# Allegro board ClassDAmpBottom.brd
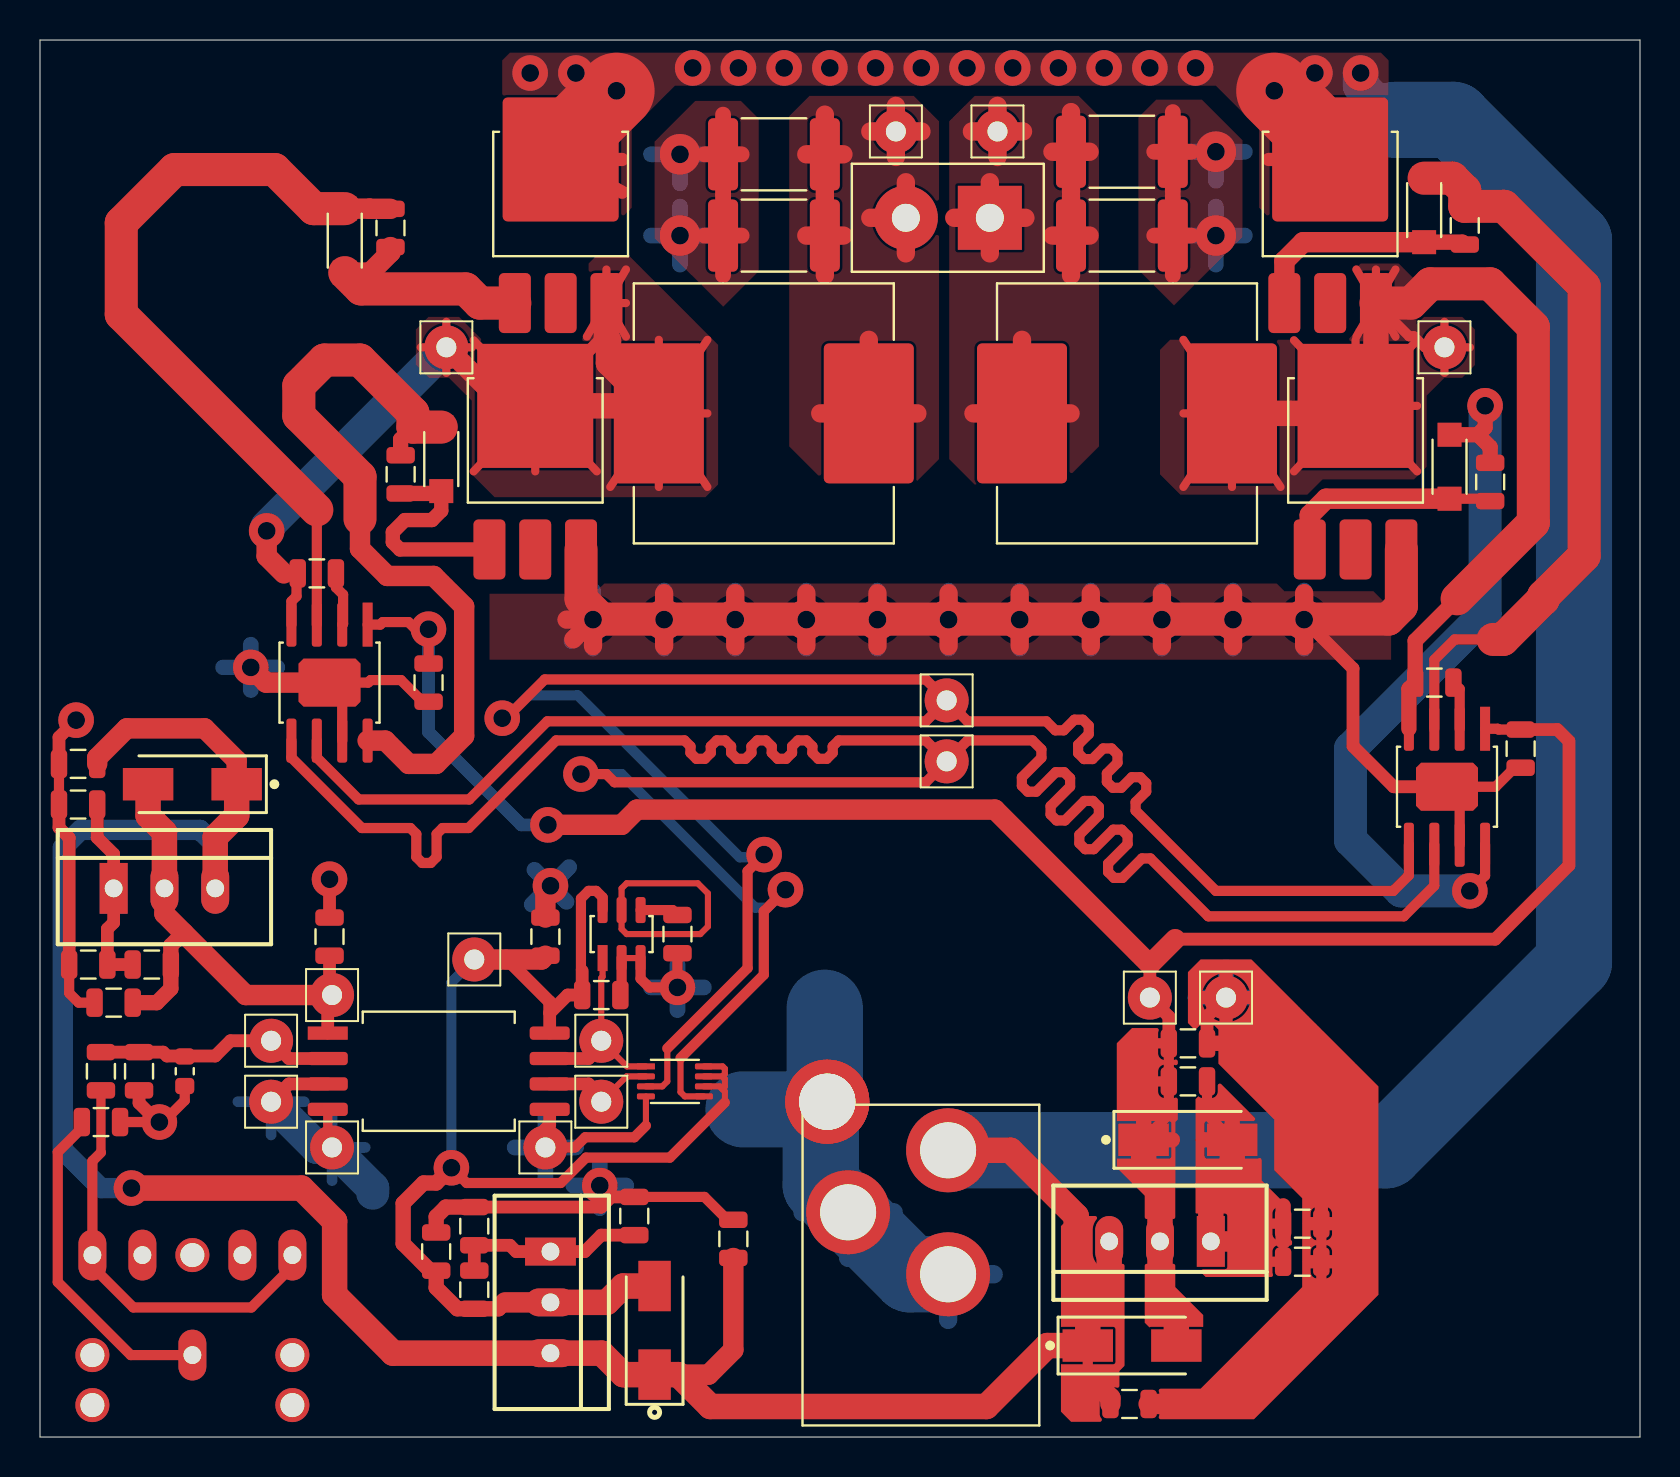
[diagram p0: board, top side]
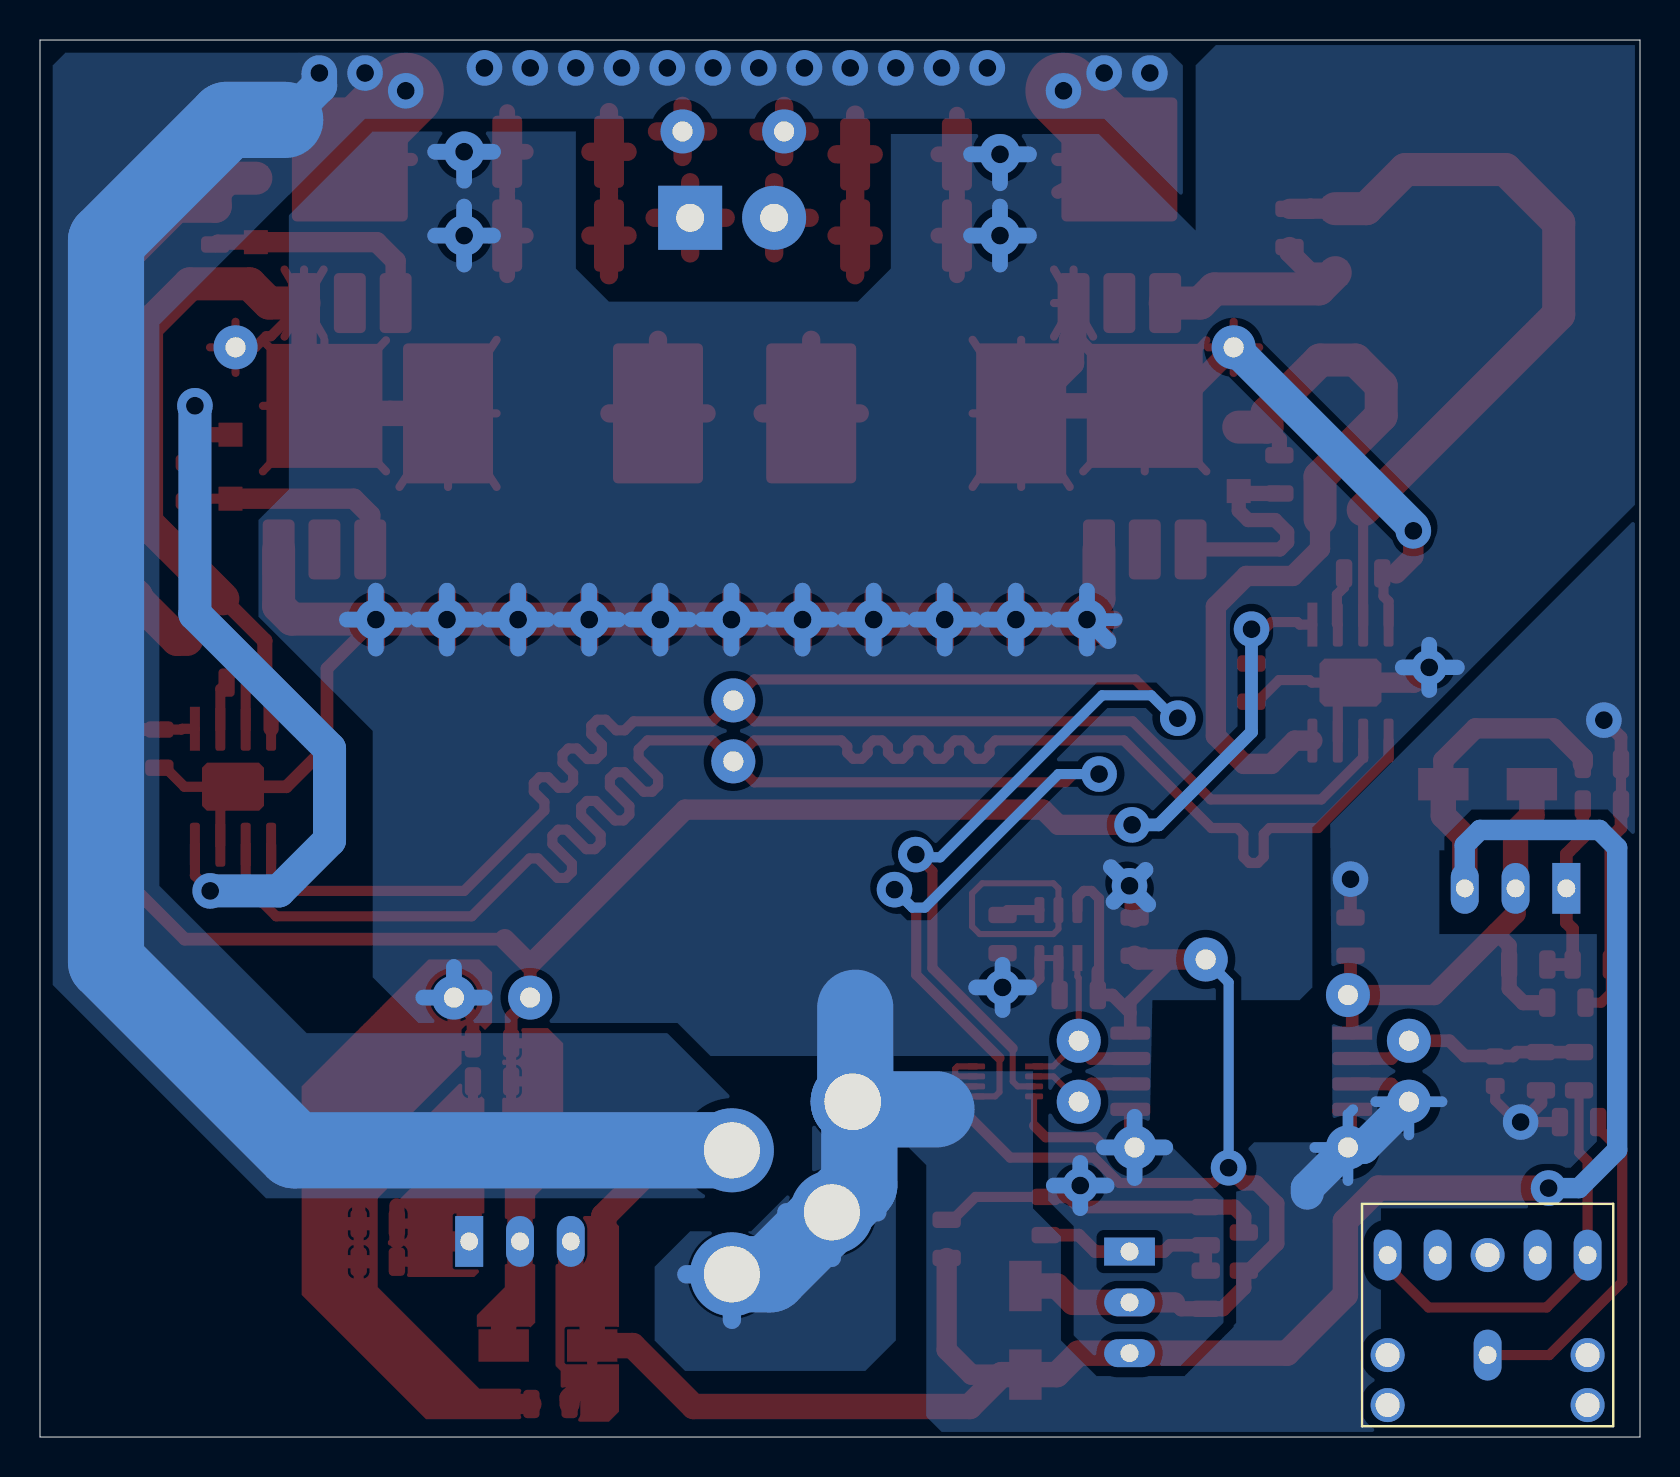
[diagram p1: board, bottom side, seen from below]

Outline 80.01 x 69.85 mm; copper layers: TOP, LAYER2, LAYER3, BOTTOM. Coordinates in mm from the lower left corner of the outline.
Outline path: 0,69.85 0,0 80.01,0 80.01,69.85 0,69.85

## Design rules (mm)
constraint set DEFAULT: min track width 0.152

## Placement (name value [footprint] x y rotation side)
C1  1n  [R0603RESC157X85X50L30N]  7.24 18.29 90 top
C2  100n  [R0805RESC200X125X50L30N]  14.48 25.02 90 top
C3  100n  [R0805RESC200X125X50L30N]  25.27 25.02 90 top
C4  100n  [R0805RESC200X125X50L30N]  28.07 22.1 180 top
C5  470n  [R0805RESC200X125X50L30N]  19.43 37.72 90 top
C6  470n  [R0805RESC200X125X50L30N]  74.04 34.42 90 top
C7  22n  [R0805RESC200X125X50L30N]  69.72 37.72 0 top
C8  22n  [R0805RESC200X125X50L30N]  13.84 43.18 180 top
C9  220n  [CAPC450X320X320L25]  36.7 64.14 0 top
C10  220n  [CAPC450X320X320L25]  54.1 64.26 180 top
C11  DNF  [CAPC450X320X320L25]  36.7 60.07 0 top
C12  DNF  [CAPC450X320X320L25]  54.1 60.07 180 top
C13  100n  [R0805RESC200X125X50L30N]  54.48 1.65 0 top
C14  1u  [R0805RESC200X125X50L30N]  57.4 19.68 0 top
C15  10u  [R0805RESC200X125X50L30N]  63.12 10.67 0 top
C16  100nF  [R0805RESC200X125X50L30N]  1.91 33.66 180 top
C17  1u  [R0805RESC200X125X50L30N]  3.68 21.72 180 top
C18  10u  [R0805RESC200X125X50L30N]  2.41 23.62 180 top
C19  1u  [R0805RESC200X125X50L30N]  19.81 9.27 90 top
C20  100n  [R0805RESC200X125X50L30N]  34.67 9.91 90 top
C21  10u  [R0805RESC200X125X50L30N]  21.72 10.54 90 top
D1  1N4148W  [GU-SOD-123FL]  15.24 59.82 270 top
D2  1N4148W  [GU-SOD-123FL]  20.07 48.9 270 top
D3  1N4148W  [GU-SOD-123FL]  70.48 48.51 270 top
D4  1N4148W  [GU-SOD-123FL]  69.22 61.34 270 top
D5  S1B  [DO-214AC]  57.4 14.86 0 top
D6  S1B  [DO-214AC]  54.61 4.57 0 top
D7  S1B  [DO-214AC]  30.73 5.33 90 top
D9  S1B  [DO-214AC]  7.62 32.64 180 top
J3  30V  [CLIFF_DC-10A_P]  49.91 0.64 90 top
J5  Output  [RHDRV2W140P420_550_2X1_960X5-1]  47.5 60.96 180 top
L1  10u  [INDM1270X1270X850L230X500]  36.2 51.18 0 top
L2  10u  [INDM1270X1270X850L230X500]  54.36 51.18 180 top
R1  2k  [R0805RESC200X125X50L30N]  3.05 18.29 90 top
R2  1k  [R0805RESC200X125X50L30N]  4.95 18.29 270 top
R3  2k  [R0805RESC200X125X50L30N]  3.05 15.75 0 top
R4  200K  [R0805RESC200X125X50L30N]  31.88 25.15 90 top
R5  10  [R0805RESC200X125X50L30N]  17.53 60.45 270 top
R6  10  [R0805RESC200X125X50L30N]  18.03 48.13 270 top
R7  10  [R0805RESC200X125X50L30N]  71.25 60.58 90 top
R8  10  [R0805RESC200X125X50L30N]  72.52 47.75 90 top
R9  1.65k  [R0805RESC200X125X50L30N]  63.12 8.76 0 top
R10  240  [R0805RESC200X125X50L30N]  57.4 17.78 0 top
R11  240  [R0805RESC200X125X50L30N]  21.72 7.37 90 top
R12  390  [R0805RESC200X125X50L30N]  29.72 11.05 90 top
R13  240  [R0805RESC200X125X50L30N]  5.59 23.62 180 top
R14  715  [R0805RESC200X125X50L30N]  1.91 31.62 180 top
SP1  SHORTING  [3SHORT]  -97.79 -107.7 0 top
T1  VinP  [TESTPOINT]  11.56 19.81 0 top
T2  VinN  [TESTPOINT]  11.56 16.76 0 top
T3  test_point_0  [TESTPOINT]  14.61 22.1 0 top
T4  test_point_0  [TESTPOINT]  14.61 14.48 0 top
T5  test_point_0  [TESTPOINT]  21.72 23.88 0 top
T6  test_point_0  [TESTPOINT]  25.27 14.48 0 top
T7  CLK  [TESTPOINT]  28.07 19.81 0 top
T8  test_point_0  [TESTPOINT]  28.07 16.76 0 top
T9  SIGNAL+  [TESTPOINT]  45.34 33.78 90 top
T10  SIGNAL-  [TESTPOINT]  45.34 36.83 90 top
T11  PREFILTER+  [TESTPOINT]  20.32 54.48 0 top
T12  PREFILTER-  [TESTPOINT]  70.23 54.48 0 top
T13  SIGNAL+  [TESTPOINT]  42.8 65.28 0 top
T14  SIGNAL-  [TESTPOINT]  47.88 65.28 0 top
T15  test_point_0  [TESTPOINT]  55.5 21.97 0 top
T16  test_point_0  [TESTPOINT]  59.31 21.97 0 top
U1  PHONEJACK STEREO SW  [3-5MM-STEREO-20-0137]  7.62 6.1 90 bottom
U2  AMC1204  [SOIC8P127_585X1150X280L75X41]  19.94 18.29 270 top
U3  LTC6907  [SOT23-6P95_270X145L35X42]  29.08 25.15 0 top
U4  NC7SV74  [SOP8P50_200X310X80L25X22]  31.75 17.78 270 top
U5  UCC27211  [SOIC9P127_490X600X170L83X41T-1]  14.48 37.72 180 top
U6  UCC27211  [SOIC9P127_490X600X170L83X41T-1]  70.36 32.51 180 top
U7  MOSFET - NVD5C684NL  [DPAK4P229_990X238L159X76T480-1]  65.79 48.77 0 top
U8  MOSFET - NVD5C684NL  [DPAK4P229_990X238L159X76T480-1]  24.77 48.77 0 top
U9  MOSFET - NVD5C684NL  [DPAK4P229_990X238L159X76T480-1]  26.04 61.09 0 top
U10  MOSFET - NVD5C684NL  [DPAK4P229_990X238L159X76T480-1]  64.52 61.09 0 top
U11  LM317M  [GU-TO220AB]  58.55 9.78 180 top
U12  LM317M  [GU-TO220AB]  25.53 9.27 270 top
U13  LM317M  [GU-TO220AB]  3.68 27.43 0 top

## Library data of the parts
C1-C14 C16 C17 C19 C20 = CAP NP
C15 C18 C21 = CAPACITOR NON-POL
D1 = DIODE_2
D2 = DIODE_3
D3 = DIODE_5
D4 = DIODE_4
D5-D7 D9 = DIODE PIN_0
J3 = CON3
J5 = HEADER 2
L1 L2 = INDUCTOR
R1-R14 = R
SP1 = SHORTING
T1-T16 = test_point_0
U1 = PHONEJACK STEREO SW_0
U2 = AMC1204
U3 = LTC6907
U4 = NC7SV74
U5 U6 = UCC27211_2
U7-U10 = MOSFET - NVD5C684NL_1
U11-U13 = LM317M_0

## Footprints (pads in the part's own frame, mm; a bottom-side part is the same pattern mirrored in y, then rotated)
3-5MM-STEREO-20-0137
  round 1.7 hole 1.2: (-4.5,-5) (-4.5,5) (-2,-5) (-2,5) (3,0)
  oval 2.54x1.397 hole 0.889: 1(-2,0) 2(3,5) 3(3,2.5) 4(3,-2.5) 5(3,-5)
3SHORT
  round 4.2 hole 2.8: 1(137.16,124.46) 2(137.16,124.46) 3(137.16,124.46)
CAPC450X320X320L25
  rrect 1.5x3.61 smd: 1(-2.545,0) 2(2.545,0)
CLIFF_DC-10A_P
  round 4.2 hole 2.8: 1(13.7,4.5) 2(10.6,9.5) 3(7.5,4.5)
DO-214AC
  rect 2.52x1.62 smd: A(2.215,0) C(-2.215,0)
DPAK4P229_990X238L159X76T480-1
  rrect 1.6x3 smd: 1(-2.29,-4.39) 2(0,-4.39) 3(2.29,-4.39)
  rrect 5.8x6.2 smd: 4(0,2.79)
GU-SOD-123FL
  rect 1.2x1.2 smd: A(1.6,0) C(-1.6,0)
GU-TO220AB
  rect 1.397x2.54 hole 0.889: 1(0,0)
  oval 1.397x2.54 hole 0.889: 2(2.54,0) 3(5.08,0)
INDM1270X1270X850L230X500
  rrect 4.5x7 smd: 1(-5.25,0) 2(5.25,0)
R0603RESC157X85X50L30N
  rrect 0.81x0.95 smd: 1(-0.74,0) 2(0.74,0)
R0805RESC200X125X50L30N
  rrect 0.82x1.42 smd: 1(-0.955,0) 2(0.955,0)
RHDRV2W140P420_550_2X1_960X5-1
  rect 3.2x3.2 hole 1.4: 1(0,0)
  round 3.2 hole 1.4: 2(4.2,0)
SOIC8P127_585X1150X280L75X41
  rect 0.66x2 smd: 1(-1.905,-5.55)
  rrect 0.66x2 smd: 2(-0.635,-5.55) 3(0.635,-5.55) 4(1.905,-5.55) 5(1.905,5.55) 6(0.635,5.55) 7(-0.635,5.55) 8(-1.905,5.55)
SOIC9P127_490X600X170L83X41T-1
  rect 0.5x2.2 smd: 1(-1.905,-2.9)
  rrect 0.5x2.2 smd: 2(-0.635,-2.9) 3(0.635,-2.9) 4(1.905,-2.9) 5(1.905,2.9) 6(0.635,2.9) 7(-0.635,2.9) 8(-1.905,2.9)
  rrect 3.1x2.4 smd: 9(0,0)
SOP8P50_200X310X80L25X22
  rect 0.3x0.9 smd: 1(-0.75,-1.45)
  rrect 0.3x0.9 smd: 2(-0.25,-1.45) 3(0.25,-1.45) 4(0.75,-1.45) 5(0.75,1.45) 6(0.25,1.45) 7(-0.25,1.45) 8(-0.75,1.45)
SOT23-6P95_270X145L35X42
  rect 0.5x1.3 smd: 1(-0.95,-1.2)
  rrect 0.5x1.3 smd: 2(0,-1.2) 3(0.95,-1.2) 4(0.95,1.2) 5(0,1.2) 6(-0.95,1.2)
TESTPOINT
  round 2.2 hole 1: 1(0,0)

## Nets
3V3: C3.1 C4.2 C19.1 D7.A R11.1 T5.1 U2.8 U3.6(V+) U4.6 U4.7 U4.8(VCC) U12.2(OUTPUT)
5V: C2.1 C17.1 D9.A R13.1 T3.1 U2.1 U13.2(OUTPUT)
10V: C5.2 C6.2 C14.1 D5.C(K) D6.A R10.1 T15.1 U5.1 U6.1 U11.2(OUTPUT)
GND: J3.2 J3.3 SP1.3
GND1: C1.1 C2.2 C16.2 C17.2 C18.2 R2.2 R3.2 R14.2 SP1.1 T2.1 T4.1 U2.3 U2.4
GND2: C3.2 C4.1 C5.1 C6.1 C9.1 C10.1 C11.1 C12.1 C13.2 C14.2 C15.2 C19.2 C20.2 C21.2 R4.1 R9.2 R12.2 SP1.2 T6.1 T16.1 U2.5 U3.2 U3.3 U4.4 U5.7(VSS) U5.9 U6.7(VSS) U6.9 U7.3(S) U8.3(S)
+V_RAIL: C13.1 C16.1 C20.1 D6.C(K) D7.C(K) D9.C(K) J3.1 U9.4 U10.4 U11.3 U12.3 U13.3
CLK: T7.1 U2.7 U3.1 U4.1
D: U7.2 U8.2 U9.2 U10.2
MOD_SIGNAL: T8.1 U2.6 U4.2
PREFILTER+: C8.2 L1.1 T11.1 U5.4 U8.4 U9.3(S)
PREFILTER-: C7.1 L2.1 T12.1 U6.4 U7.4 U10.3(S)
SIGNAL+: T9.1 U4.5 U5.5 U6.6
SIGNAL-: T10.1 U4.3 U5.6 U6.5
N08313: R1.1 U1.2 U1.5
N08317: R3.1 U1.1(E)
N08321: C1.2 R1.2 R2.1 T1.1 U2.2(VINP)
N11549: R4.2 U3.4
N14416: D3.C(K) R8.2 U6.8
N14431: D4.C(K) R7.2 U6.3
N14441: D1.C(K) R5.1 U5.3
N14452: D2.C(K) R6.1 U5.8
N14665: D4.A R7.1 U10.1
N14669: D3.A R8.1 U7.1
N14687: D1.A R5.2 U9.1
N14691: D2.A R6.2 U8.1
N16540: C8.1 U5.2
N16584: C7.2 U6.2
N20136: C9.2 C11.2 J5.2 L1.2 T13.1
N20333: C10.2 C12.2 J5.1 L2.2 T14.1
N24103: C15.1 D5.A R9.1 R10.2 U11.1
N25160: C21.1 R11.2 R12.1 U12.1
N25746: C18.1 R13.2 R14.1 U13.1

Pads without a net: U1 3 4; U3 5

## Via types
v1: diameter 1.778, hole 0.889, TOP to BOTTOM, 36 vias
v2: diameter 2.032, hole 0.889, TOP to BOTTOM, 15 vias

## Routing (per net, layer and track width the routed paths; a pad name or vN(x,y) marks a point on that pad's centre or on a via; arc(x,y) is an arc through that point)
3V3: length 68.5
  TOP w0.305: U4.8 34.13,18.53 34.25,18.41 34.25,18.15 34.12,18.03 ; 34.25,16.72 34.25,17.27 34.12,17.4 ; 34.12,17.4 33.99,17.53 U4.6 ; 34.12,17.4 34.25,17.53 34.25,17.91 34.12,18.03 ; 34.12,18.03 U4.7
  TOP w0.508: 34.25,16.72 31.5,13.97 27.3,13.97 26.04,12.7 21.34,12.7 v1(20.57,13.46) ; U3.6 28.13,26.98 27.81,27.3 27.43,27.3 27.05,26.92 27.05,23.37 27.11,23.31
  TOP w0.635: 23.26,23.88 23.37,23.88 25.49,21.76 25.49,21.2 ; 27.11,23.31 C4.2 26.38,22.1 25.49,21.2 ; 25.49,21.2 U2.8
  TOP w0.762: 23.26,6.73 22.94,6.41 R11.1 20.87,6.41 19.81,7.47 C19.1 19.51,8.32 18.16,9.67 18.16,11.68 19.18,12.7 19.81,12.7 v1(20.57,13.46)
  TOP w1.016: C3.1 25.09,23.88 23.37,23.88 ; 23.26,6.73 U12.2 ; T5.1 23.26,23.88
  TOP w1.27: D7.A 29.16,7.55 28.34,6.73 U12.2
  BOTTOM w0.508: T5.1 20.57,22.73 v1(20.57,13.46)
5V: length 26.4
  TOP w0.635: 14.73,22.1 14.48,22.35 C2.1 ; 14.73,22.1 T3.1 ; 14.73,22.1 14.39,21.76 U2.1
  TOP w0.762: 7.18,25.21 6.54,24.58 R13.1 6.54,22.42 5.84,21.72 C17.1
  TOP w1.016: U13.2 6.22,26.16 10.29,22.1 T3.1
  TOP w1.27: U13.2 6.22,30.25 5.41,31.07 D9.A
10V: length 110.9
  TOP w0.508: D5.C 56.45,16.12 R10.1 ; C6.2 72.93,35.37 72.89,35.41 U6.1 ; U5.1 17.01,40.62 17.14,40.75 18.43,40.75 19.05,40.13 ; 19.05,40.13 19.43,39.74 C5.2 ; 19.05,40.13 19.31,40.39 v1(19.43,40.39) ; R10.1 55.24,17.78 ; R10.1 C14.1 55.24,19.68
  TOP w0.635: 55.5,23.62 T15.1 56.45,21.02 C14.1 ; 56.77,24.89 72.77,24.89 76.45,28.57 76.45,34.8 75.88,35.37 C6.2
  TOP w0.762: 55.19,15.85 D5.C 56.63,14.86
  TOP w1.016: v1(25.4,30.61) 29.08,30.61 29.84,31.37 47.75,31.37 55.5,23.62 56.77,24.89
  TOP w1.27: D6.A 56.82,6.14 56.01,6.96 U11.2 56.01,12.32 55.19,13.14 D5.C
  BOTTOM w0.635: v1(19.43,40.39) 19.43,35.25 24.07,30.61 v1(25.4,30.61)
GND: length 24.1
  BOTTOM w0.914: 45.41,5.86 J3.3 47.69,8.14 ; J3.2 42.69,11.23 ; J3.2 38.13,11.23 ; J3.2 40.41,8.96
  BOTTOM w3.81: SP1.3 39.04,16.43 39.04,12.61 J3.2 ; 40.41,11.41 J3.2 ; J3.2 43.51,8.14 J3.3
GND1: length 50.8
  TOP w0.457: U2.4 14.39,14.69 T4.1
  TOP w0.508: C1.1 7.24,16.83 6.16,15.75 v1(5.97,15.75) R3.2 ; R14.2 C16.2 ; C18.2 1.46,22.2 1.94,21.72 C17.2
  TOP w0.635: C2.2 v1(14.48,27.89) ; T2.1 12.45,17.65 U2.3 ; C16.2 0.95,34.99 v1(1.81,35.84) ; R2.2 4.95,16.7 5.9,15.75 ; C18.2 1.46,29.96 0.95,30.47 R14.2
  BOTTOM w0.508: 14.35,16.38 14.48,16.26
  BOTTOM w0.533: 9.9,16.76 T2.1 ; T2.1 11.56,15.1 ; T2.1 13.22,16.76 ; T4.1 14.61,16.14 ; T4.1 14.61,12.82 ; T4.1 16.26,14.48
  BOTTOM w1.651: 16.64,12.19 16.64,12.45 T4.1 13.84,14.48 T2.1
  BOTTOM w3.81: 35.18,16.38 38.99,16.38 SP1.1
GND2: length 337.1
  TOP w0.305: 30.3,15.57 U4.4 ; U3.2 U3.3
  TOP w0.508: U5.7 15.11,37.43 14.83,37.72 ; U3.2 29.08,22.16 C4.1 ; 14.83,37.72 16.41,37.72 16.54,37.85 18.05,37.85 19.13,36.76 C5.1 ; 14.83,37.72 U5.9 ; R12.2 33.23,12 34.37,10.86 C20.2 ; R4.1 v1(31.88,22.48) 30.47,22.48 30.03,22.92 U3.3 ; 30.3,15.57 29.72,14.99 27.26,14.99 26.75,14.48 T6.1 ; C15.2 R9.2 64.07,6.92 ; 70.99,29.61 70.99,31.88 U6.9 72.79,32.51 73.74,33.46 C6.1
  TOP w0.635: R12.2 28.56,12 28.06,11.5 ; U6.9 67.69,32.51 65.66,34.54 65.66,38.42 v2(63.21,40.87) ; 28.06,11.5 28.06,12.51 v1(27.99,12.57) ; 28.06,11.5 C21.2 ; T16.1 58.36,21.02 C14.2 ; U2.5 25.49,15.61 25.27,15.39 T6.1
  TOP w0.66: T16.1 60.59,21.97 ; T16.1 59.31,23.25 ; T16.1 58.03,21.97 ; T16.1 59.31,20.69 ; C15.2 64.66,10.67 ; C15.2 63.49,10.67 ; C15.2 64.07,11.56 ; 63.49,8.76 R9.2 64.66,8.76
  TOP w0.762: C19.2 19.81,11.02 20.29,11.5 C21.2 ; 59.4,19.68 C14.2 ; 25.27,27.1 25.53,27.36 v1(25.53,27.56)
  TOP w0.787: C10.1 57.58,64.26 ; C10.1 56.65,66.25 ; C10.1 56.65,62.28 ; C10.1 55.72,64.26 ; 34.16,58.09 C11.1 ; C11.1 35.09,60.07 ; C11.1 34.16,62.05 ; C11.1 33.23,60.07 ; C9.1 34.16,66.12 ; C9.1 33.23,64.14 ; C9.1 34.16,62.15 ; C9.1 35.09,64.14 ; C12.1 56.65,62.05 ; C12.1 55.72,60.07 ; C12.1 57.58,60.07 ; C12.1 56.65,58.09
  TOP w0.914: v2(38.32,40.87) 38.32,42.19 ; v2(38.32,40.87) 37,40.87 ; v2(38.32,40.87) 38.32,39.55 ; v2(38.32,40.87) 39.64,40.87 ; 27.65,39.55 v2(27.65,40.87) ; v2(27.65,40.87) 28.98,40.87 ; v2(27.65,40.87) 26.33,40.87 ; v2(27.65,40.87) 26.67,39.88 ; v2(56.1,40.87) 56.1,42.19 ; v2(56.1,40.87) 57.42,40.87 ; v2(56.1,40.87) 56.1,39.55 ; v2(56.1,40.87) 54.78,40.87 ; 41.88,39.55 v2(41.88,40.87) ; v2(41.88,40.87) 43.2,40.87 ; v2(41.88,40.87) 41.88,42.19 ; v2(41.88,40.87) 40.56,40.87 ; v2(59.66,40.87) 59.66,42.19 ; v2(59.66,40.87) 59.66,39.55 ; v2(59.66,40.87) 58.34,40.87 ; v2(59.66,40.87) 60.98,40.87 ; 31.21,39.55 v2(31.21,40.87) ; v2(31.21,40.87) 29.89,40.87 ; v2(31.21,40.87) 32.53,40.87 ; v2(31.21,40.87) 31.21,42.19 ; v2(34.77,40.87) 34.77,42.19 ; v2(34.77,40.87) 33.44,40.87 ; v2(34.77,40.87) 36.09,40.87 ; v2(34.77,40.87) 34.77,39.55 ; v2(45.43,40.87) 46.76,40.87 ; v2(45.43,40.87) 45.43,39.55 ; v2(45.43,40.87) 45.43,42.19 ; v2(45.43,40.87) 44.11,40.87 ; 52.55,39.55 v2(52.55,40.87) ; v2(52.55,40.87) 53.87,40.87 ; v2(52.55,40.87) 51.22,40.87 ; v2(52.55,40.87) 52.55,42.19 ; v2(48.99,40.87) 50.31,40.87 ; v2(48.99,40.87) 47.67,40.87 ; v2(48.99,40.87) 48.99,39.55 ; v2(48.99,40.87) 48.99,42.19 ; 61.89,40.87 v2(63.21,40.87) ; v2(63.21,40.87) 63.21,39.55 ; v2(63.21,40.87) 63.21,42.19 ; v2(63.21,40.87) 64.54,40.87
  TOP w1.016: U5.9 11.3,37.72 v1(10.54,38.48) ; C13.2 58.8,1.65 ; C3.2 25.27,27.1
  TOP w1.651: U7.3 68.08,41.55 67.42,40.89 28.07,40.89 27.06,41.91 U8.3
  BOTTOM w0.635: 26.19,40.87 v2(27.65,40.87)
  BOTTOM w0.762: 9.14,38.48 v1(10.54,38.48)
  BOTTOM w0.787: 48.99,39.42 v2(48.99,40.87) ; v2(48.99,40.87) 48.99,42.32 ; v2(48.99,40.87) 47.54,40.87 ; v2(48.99,40.87) 50.44,40.87 ; v1(10.54,38.48) 10.54,39.61 ; v1(10.54,38.48) 10.54,37.35 ; v1(10.54,38.48) 11.86,38.48 ; v2(27.65,40.87) 27.65,42.32 ; v2(27.65,40.87) 27.65,39.42 ; v2(27.65,40.87) 26.58,39.79 ; v2(27.65,40.87) 29.1,40.87 ; v2(34.77,40.87) 36.21,40.87 ; v2(34.77,40.87) 33.32,40.87 ; v2(34.77,40.87) 34.77,42.32 ; v2(34.77,40.87) 34.77,39.42 ; v2(59.66,40.87) 61.11,40.87 ; v2(59.66,40.87) 59.66,42.32 ; v2(59.66,40.87) 59.66,39.42 ; v2(59.66,40.87) 58.21,40.87 ; v2(63.21,40.87) 63.21,42.32 ; v2(63.21,40.87) 61.77,40.87 ; v2(63.21,40.87) 63.21,39.42 ; v2(63.21,40.87) 64.66,40.87 ; v2(38.32,40.87) 38.32,42.32 ; v2(38.32,40.87) 36.87,40.87 ; v2(38.32,40.87) 38.32,39.42 ; v2(38.32,40.87) 39.77,40.87 ; 30.56,60.07 v2(32,60.07) ; v2(32,60.07) 33.45,60.07 ; v2(32,60.07) 32,58.62 ; v2(32,60.07) 32,61.52 ; 26.67,12.57 v1(27.99,12.57) ; v1(27.99,12.57) 29.31,12.57 ; v1(27.99,12.57) 27.99,13.7 ; v1(27.99,12.57) 27.99,11.44 ; T6.1 25.27,16.01 ; T6.1 25.27,12.95 ; T6.1 26.81,14.48 ; T6.1 23.74,14.48 ; v2(58.8,64.26) 60.25,64.26 ; v2(58.8,64.26) 57.35,64.26 ; v2(58.8,64.26) 58.8,62.81 ; 52.55,39.42 v2(52.55,40.87) ; v2(52.55,40.87) 52.55,42.32 ; v2(52.55,40.87) 53.99,40.87 ; v2(52.55,40.87) 51.1,40.87 ; 24.59,26.62 v1(25.53,27.56) ; v1(25.53,27.56) 24.73,28.36 ; v1(25.53,27.56) 26.46,28.49 ; v1(25.53,27.56) 26.33,26.76 ; v2(31.21,40.87) 32.66,40.87 ; v2(31.21,40.87) 29.76,40.87 ; v2(31.21,40.87) 31.21,39.42 ; v2(31.21,40.87) 31.21,42.32 ; v2(56.1,40.87) 56.1,42.32 ; v2(56.1,40.87) 56.1,39.42 ; v2(56.1,40.87) 54.65,40.87 ; v2(56.1,40.87) 57.55,40.87 ; 31.88,21.35 v1(31.88,22.48) ; v1(31.88,22.48) 33.2,22.48 ; v1(31.88,22.48) 30.56,22.48 ; v1(31.88,22.48) 31.88,23.61 ; T16.1 60.84,21.97 ; T16.1 59.31,23.5 ; T16.1 57.78,21.97 ; 57.35,60.07 v2(58.8,60.07) ; v2(58.8,60.07) 58.8,58.62 ; v2(58.8,60.07) 60.25,60.07 ; v2(58.8,60.07) 58.8,61.52 ; v2(45.43,40.87) 46.88,40.87 ; v2(45.43,40.87) 43.99,40.87 ; v2(45.43,40.87) 45.43,42.32 ; v2(45.43,40.87) 45.43,39.42 ; v2(41.88,40.87) 41.88,42.32 ; v2(41.88,40.87) 41.88,39.42 ; v2(41.88,40.87) 40.43,40.87 ; v2(41.88,40.87) 43.33,40.87 ; v2(32,64.14) 33.45,64.14 ; v2(32,64.14) 32,62.69 ; v2(32,64.14) 30.56,64.14
  BOTTOM w3.81: 39.24,21.46 39.24,16.89 SP1.2
+V_RAIL: length 243.8
  TOP w0.508: 52.4,3.08 D6.C
  TOP w0.66: 61.44,67.16 U10.4 ; U10.4 61.44,63.88 ; U10.4 61.44,65.52 ; U9.4 29.11,67.16 ; U9.4 29.11,63.88 ; U9.4 29.11,62.24
  TOP w1.016: C16.1 2.86,33.96 4.34,35.43 8.23,35.43 9.83,33.83 D9.C ; 31.93,3.12 33.44,3.12 34.67,4.35 C20.1 ; 52.4,3.08 53.53,1.95 C13.1
  TOP w1.27: 51.82,9.84 51.82,11.05 48.53,14.33 J3.1 ; U13.3 8.76,30 9.83,31.07 D9.C ; v1(4.57,12.45) 13.08,12.45 14.73,10.79 14.73,7.11 17.65,4.19 U12.3 28.09,4.19 29.16,3.12 D7.C 31.93,3.12 33.52,1.52 47.33,1.52 50.37,4.57 D6.C 52.4,6.14 53.47,7.22 U11.3
  TOP w3.81: v1(61.72,67.31) 64.52,64.52 U10.4 ; v1(28.83,67.31) 26.04,64.52 U9.4
  BOTTOM w1.016: v1(4.57,12.45) 3.05,12.45 1.14,14.35 1.14,29.46 2.03,30.35 8,30.35 8.76,29.59 U13.3
  BOTTOM w1.778: 67.75,65.86 66.04,67.56 66.04,68.07
  BOTTOM w3.81: 67.75,65.86 70.67,65.86 76.71,59.82 76.71,23.75 67.29,14.33 J3.1
  vias: v1(24.51,68.2) v1(26.8,68.2) v1(32.64,68.45) v1(34.92,68.45) v1(37.21,68.45) v1(39.5,68.45) v1(41.78,68.45) v1(44.07,68.45) v1(46.35,68.45) v1(48.64,68.45) v1(50.93,68.45) v1(53.21,68.45) v1(55.5,68.45) v1(57.78,68.45) v1(63.75,68.2) v1(66.04,68.2)
CLK: length 10
  TOP w0.305: U3.1 28.13,23.02 28.07,22.95 T7.1 29.35,18.53 U4.1
  TOP w0.635: U2.7 27.43,18.92 28.07,19.56 T7.1
MOD_SIGNAL: length 5.9
  TOP w0.305: T8.1 29.33,18.03 U4.2
  TOP w0.635: U2.6 27.43,17.65 28.07,17.02 T8.1
Net_35: length 12.9
  TOP w0.305: 29.34,27.69 29.08,27.43 29.08,26.35 29.08,25.4 29.34,25.15 33.02,25.15 33.4,25.53 33.4,27.18 32.89,27.69 29.34,27.69
PREFILTER+: length 106.6
  TOP w0.406: 28.52,51.18 L1.1 ; L1.1 28.52,47.5 ; L1.1 33.37,47.5 ; L1.1 33.37,54.86 ; L1.1 33.37,51.18 ; L1.1 30.95,47.5 ; L1.1 30.95,54.86 ; L1.1 28.52,54.86 ; U9.3 29.3,55.02 ; U9.3 27.35,55.02 ; U9.3 29.3,56.7 ; U9.3 29.3,58.38 ; U9.3 28.33,58.38 ; U8.4 27.84,54.84 ; U8.4 24.77,48.28 ; U8.4 27.84,48.28 ; U8.4 21.69,48.28 ; U8.4 21.69,54.84 ; T11.1 21.6,54.48 ; T11.1 20.32,55.76 ; T11.1 20.32,53.2 ; T11.1 19.04,54.48
  TOP w0.508: U8.4 28.33,55.12 ; U5.4 12.57,41.78 12.83,42.04 12.83,43.12 C8.2
  TOP w0.762: 12.19,43.18 C8.2
  TOP w1.016: 12.19,43.18 11.33,44.04 v1(11.33,45.31) ; T11.1 23.25,51.56 U8.4
  TOP w1.27: 30.57,51.56 28.43,53.7 28.43,54.41 28.43,54.83 28.33,54.93 U9.3 ; 30.57,51.56 L1.1 ; 30.57,51.56 U8.4
  BOTTOM w0.508: 11.33,45.5 v1(11.33,45.31)
  BOTTOM w1.651: T11.1 11.33,45.5
PREFILTER-: length 111.6
  TOP w0.406: 62.71,48.28 U7.4 ; U7.4 65.79,54.84 ; U7.4 68.86,51.56 ; U7.4 68.86,54.84 ; U7.4 62.71,51.56 ; U7.4 68.86,48.28 ; U7.4 62.71,54.84 ; L2.1 62.03,47.5 ; L2.1 57.18,47.5 ; L2.1 57.18,54.86 ; L2.1 59.61,47.5 ; L2.1 57.18,51.18 ; 65.83,55.02 U10.3 ; U10.3 65.83,58.38 ; U10.3 67.78,55.02 ; U10.3 66.81,58.38 ; U10.3 67.78,58.38 ; T12.1 71.51,54.48 ; T12.1 70.23,53.2 ; T12.1 70.23,55.76
  TOP w0.508: T12.1 69.25,54.48 68.7,55.04 68.46,55.04 U10.3 ; 65.79,51.18 62.5,51.18 62.5,51.18
  TOP w0.762: 70.87,41.91 68.77,39.81 C7.1 68.45,37.4 U6.4
  TOP w1.27: L2.1 65.78,51.18 65.79,51.18 66.81,52.2 U10.3
  TOP w1.651: 70.87,41.91 74.68,45.72 74.68,55.5 72.52,57.66 69.52,57.66 68.56,56.7 U10.3
SIGNAL+: length 134.7
  TOP w0.305: U4.5 32.25,17.03 32.03,17.25 32.03,18.95
  TOP w0.508: 32.03,18.95 36.2,23.11 36.2,26.28 v1(37.28,27.37) ; T9.1 44.29,34.83 39.94,34.83 39.64,34.53 39.64,34.21 39.34,33.91 38.92,33.91 38.62,34.21 38.62,34.53 38.33,34.83 37.91,34.83 37.61,34.53 37.61,34.21 37.31,33.91 36.89,33.91 36.59,34.21 36.59,34.53 36.29,34.83 35.87,34.83 35.58,34.53 35.58,34.21 35.28,33.91 34.86,33.91 34.56,34.21 34.56,34.53 34.26,34.83 33.84,34.83 33.54,34.53 33.54,34.21 33.25,33.91 32.83,33.91 32.53,34.21 32.53,34.53 32.23,34.83 25.81,34.83 21.43,30.45 20.13,30.45 19.83,30.15 19.83,29 19.54,28.7 19.12,28.7 18.82,29 18.82,30.15 18.52,30.45 16.09,30.45 12.57,33.97 U5.5 ; T9.1 46.39,34.83 49.63,34.83 50.08,34.38 50.08,33.96 49.1,32.98 49.1,32.56 49.4,32.26 49.82,32.26 50.79,33.24 51.21,33.24 51.51,32.94 51.51,32.52 50.54,31.55 50.54,31.12 50.83,30.83 51.25,30.83 52.23,31.8 52.65,31.8 52.95,31.51 52.95,31.08 51.97,30.11 51.97,29.69 52.27,29.39 52.69,29.39 53.67,30.37 54.09,30.37 54.39,30.07 54.39,29.65 53.41,28.67 53.41,28.25 53.71,27.95 54.13,27.95 55.11,28.93 55.53,28.93 58.42,26.04 68.2,26.04 69.72,27.56 U6.6 ; T9.1 44.29,32.73 28.73,32.73 28.32,33.15 v1(27.05,33.15)
  BOTTOM w0.508: v1(27.05,33.15) 29.08,33.15 35.76,26.47 36.38,26.47 v1(37.28,27.37)
SIGNAL-: length 125.1
  TOP w0.305: U4.3 31.12,17.53 31.37,17.78 31.37,19.43
  TOP w0.508: 31.37,19.43 35.38,23.45 35.38,28.29 v1(36.21,29.12) ; v1(23.11,35.94) 23.3,35.94 25.24,37.88 44.29,37.88 T10.1 ; T10.1 46.39,35.78 50.32,35.78 50.77,35.33 51.19,35.33 51.73,35.86 52.15,35.86 52.44,35.57 52.44,35.15 51.91,34.61 51.91,34.19 52.21,33.9 52.63,33.9 53.16,34.43 53.58,34.43 53.88,34.13 53.88,33.71 53.35,33.18 53.35,32.76 53.65,32.46 54.07,32.46 54.6,32.99 55.02,32.99 55.32,32.69 55.32,32.27 54.79,31.74 54.79,31.32 58.8,27.3 67.67,27.3 68.45,28.09 U6.5 ; T10.1 44.29,35.78 25.37,35.78 21.46,31.88 15.94,31.88 13.84,33.97 U5.6
  BOTTOM w0.508: v1(23.11,35.94) 23.3,35.94 24.45,37.08 26.9,37.08 35,28.99 36.08,28.99 v1(36.21,29.12)
N08313: length 21.3
  TOP w0.457: R1.1 3.05,14.22
  TOP w0.508: 3.05,14.22 2.62,13.8 U1.5 2.62,8.52 4.67,6.48 10.57,6.48 12.62,8.52 U1.2
N08317: length 16.7
  TOP w0.508: R3.1 2.09,15.45 0.89,14.24 0.89,7.75 4.54,4.1 U1.1
N08321: length 12.1
  TOP w0.635: 7.22,19.05 8.76,19.05 9.53,19.81 T1.1 12.45,18.92 U2.2 ; 7.22,19.05 C1.2 ; 7.22,19.05 6.35,19.05 6.16,19.24 R2.1 R1.2
N11549: length 1.9
  TOP w0.508: U3.4 31.63,26.35 R4.2
N14416: length 38.8
  TOP w0.508: U6.8 72.26,28.07 v1(71.5,27.3)
  TOP w0.762: R8.2 72.52,49.5 71.9,50.11 ; 71.9,50.11 72.26,50.48 v1(72.26,51.56) ; 71.9,50.11 D3.C
  BOTTOM w1.651: v1(71.5,27.3) 68.06,27.3 65.53,29.84 65.53,34.42 72.26,41.15 v1(72.26,51.56)
N14431: length 37.3
  TOP w0.508: 72.67,39.88 70.74,39.88 69.72,38.86 U6.3
  TOP w1.651: 72.67,39.88 73.15,39.88 75.18,41.91 75.18,42.04 77.22,44.07 77.22,57.53 73.21,61.53 R7.2 71.25,62.32 70.63,62.94 D4.C
N14441: length 39.5
  TOP w0.508: 13.84,46.35 U5.3
  TOP w1.016: R5.1 16.48,61.41 16.47,61.42 D1.C
  TOP w1.651: 13.84,46.35 4.06,56.13 4.06,60.71 6.73,63.37 11.73,63.37 13.69,61.42 D1.C
N14452: length 39.3
  TOP w0.762: R6.1 18.03,49.88 18.65,50.49
  TOP w1.016: U5.8 17.27,34.82 18.43,33.66 19.81,33.66 21.21,35.05 21.21,41.53 19.68,43.05 17.36,43.05 16,44.41 16,45.91
  TOP w1.651: 16,45.91 16,48.01 12.94,51.06 12.94,52.57 14.22,53.85 16,53.85 18.65,51.2 18.65,50.49 D2.C
N14665: length 11.6
  TOP w0.762: D4.A 71.13,59.74 R7.1
  TOP w1.016: U10.1 62.23,58.8 63.17,59.74 D4.A
N14669: length 11.5
  TOP w0.508: D3.A 72.4,46.91 R8.1 ; 63.5,44 U7.1
  TOP w1.016: U7.1 63.5,46.1 64.31,46.91 D3.A
N14687: length 12.1
  TOP w1.016: D1.A 16.51,58.22 17.53,59.23 R5.2
  TOP w1.651: D1.A 16.05,57.4 21.29,57.4 21.99,56.7 U9.1
N14691: length 11.4
  TOP w0.508: 19.95,47.18 D2.A
  TOP w0.711: U8.1 18,44.38 17.64,44.74 17.64,45.25 18.24,45.85 19.6,45.85 20.07,46.31 D2.A
  TOP w0.762: R6.2 19.95,47.18
N16540: length 2.7
  TOP w0.508: U5.2 15.16,40.66 15.16,42.12 14.8,42.48 C8.1
N16584: length 2.4
  TOP w0.508: 70.99,35.41 70.99,37.4 C7.2
N20136: length 30.6
  TOP w0.914: J5.2 43.3,62.74 ; J5.2 43.3,59.18 ; J5.2 41.52,60.96 ; T13.1 44.08,65.28 ; T13.1 41.52,65.28 ; T13.1 42.8,66.56 ; T13.1 42.8,64 ; L1.2 41.44,54.86 ; L1.2 39.02,51.18 ; L1.2 43.87,51.18 ; C9.2 40.18,64.14 ; C9.2 38.32,64.14 ; C9.2 39.25,62.15 ; C9.2 39.25,66.12 ; C11.2 39.25,62.05 ; C11.2 40.18,60.07 ; C11.2 38.32,60.07 ; C11.2 39.25,58.09
N20333: length 32.4
  TOP w0.914: C12.2 51.56,62.05 ; C12.2 51.56,58.09 ; C12.2 50.63,60.07 ; C12.2 52.49,60.07 ; L2.2 51.53,51.18 ; L2.2 46.68,51.18 ; L2.2 49.11,54.86 ; 45.72,60.96 J5.1 ; J5.1 49.28,60.96 ; J5.1 47.5,59.18 ; J5.1 47.5,62.74 ; T14.1 47.88,66.56 ; T14.1 46.6,65.28 ; T14.1 49.16,65.28 ; T14.1 47.88,64 ; 51.56,62.28 C10.2 ; C10.2 52.49,64.26 ; C10.2 51.56,66.25 ; C10.2 50.63,64.26
N24103: length 19.9
  TOP w0.508: C15.1 60.77,10.67 59.88,9.78 60.9,8.76 R9.1 ; D5.A 58.36,16.12 R10.2
  TOP w0.762: 62.16,9.78 C15.1 62.16,11.56 ; 59.62,15.85 D5.A 58.18,14.86
  TOP w1.016: 59.88,9.78 U11.1
  TOP w1.27: U11.1 58.55,11.81 59.62,12.88 D5.A
N25160: length 9.7
  TOP w0.635: R11.2 C21.1 23.5,9.59 23.81,9.27 U12.1 27.24,9.27 28.06,10.09 R12.1
N25746: length 9.7
  TOP w0.635: R13.2 C18.1 3.37,25.4 3.68,25.72 U13.1 3.68,29.15 2.86,29.97 R14.1

## Copper pours and planes (outline as drawn; the poured copper is in the pictures)
10V on TOP (solid shape): 56.71,8.65 56.77,8.56 56.77,7.49 58.17,6.1 58.17,5.51 58.08,5.51 55.57,5.51 55.54,5.51 55.51,5.5 55.48,5.48 55.24,5.71 55.24,8.56 55.31,8.65 55.42,8.63 56.01,8.38 56.6,8.63
10V on TOP (solid shape): 55.84,20.45 55.92,20.4 55.94,20.31 55.92,20.25 55.91,20.18 55.91,19.19 56.01,18.95 56.25,18.85 56.65,18.85 56.71,18.85 56.76,18.87 56.85,18.85 56.9,18.77 56.9,18.69 56.85,18.61 56.76,18.6 56.71,18.61 56.65,18.62 56.25,18.62 56.01,18.52 55.91,18.28 55.91,17.28 56.01,17.04 56.25,16.94 56.65,16.94 56.71,16.95 56.76,16.96 56.85,16.95 56.9,16.87 56.9,15.88 56.77,15.75 56.77,11 56.71,10.91 56.6,10.93 56.01,11.18 55.42,10.93 55.31,10.91 55.24,11 55.24,12.06 53.85,13.46 53.85,13.92 53.93,13.92 56.45,13.92 56.54,13.96 56.58,14.05 56.58,15.67 56.54,15.76 56.45,15.8 53.93,15.8 53.85,15.79 53.85,19.68 54.61,20.45
GND on BOTTOM: 47.5,10.29 44.45,10.29 41.4,13.34 41.4,17.78 40.26,18.92 38.48,18.92 37.21,17.65 37.21,4.83 38.73,3.3 47.75,3.3 49.28,4.83 49.28,8.51
GND1 on BOTTOM: 12.83,0.25 12.95,0.38 12.95,11.43 2.67,11.43 0.38,13.72 0.25,13.72 0.25,45.97 15.49,30.73 15.37,14.73 19.3,14.73 20.19,13.84 20.19,5.71 22.86,3.05 27.18,3.05 28.96,4.83 28.96,10.03 30.35,11.43 30.35,18.29 37.08,18.29 37.08,14.99 35.69,13.59 35.69,1.02 34.92,0.25 ; 1 cut-out
GND2 on TOP (solid shape): 66.93,17.53 66.93,7.11 60.71,0.89 56.05,0.89 56.01,0.9 55.98,0.91 55.96,0.93 55.95,0.96 55.94,0.99 55.96,1.06 55.97,1.12 55.98,1.15 55.98,2.15 55.97,2.18 55.96,2.24 55.94,2.32 55.95,2.34 55.96,2.37 55.98,2.39 56.01,2.4 56.05,2.41 58.04,2.41 63.12,7.49 63.12,9.26 63.54,9.26 63.54,8.26 63.54,8.24 63.55,8.18 63.56,8.13 63.59,8.09 63.62,8.04 63.65,8.01 63.7,7.97 63.74,7.95 63.8,7.93 63.85,7.93 63.87,7.93 64.27,7.93 64.3,7.93 64.35,7.93 64.4,7.95 64.45,7.98 64.49,8.01 64.53,8.04 64.56,8.09 64.59,8.13 64.6,8.18 64.61,8.24 64.61,8.26 64.61,9.26 64.61,9.29 64.6,9.34 64.59,9.39 64.56,9.44 64.53,9.48 64.49,9.52 64.45,9.55 64.4,9.58 64.35,9.59 64.3,9.6 64.27,9.6 63.87,9.6 63.85,9.6 63.8,9.59 63.74,9.57 63.7,9.55 63.65,9.52 63.62,9.48 63.59,9.44 63.56,9.39 63.55,9.34 63.54,9.29 63.54,9.26 63.12,9.26 63.12,11.17 63.54,11.17 63.54,10.17 63.54,10.14 63.55,10.09 63.56,10.04 63.59,9.99 63.62,9.95 63.65,9.91 63.7,9.88 63.74,9.86 63.8,9.84 63.85,9.83 63.87,9.83 64.27,9.83 64.3,9.83 64.35,9.84 64.4,9.86 64.45,9.88 64.49,9.91 64.53,9.95 64.56,9.99 64.59,10.04 64.6,10.09 64.61,10.14 64.61,10.17 64.61,11.17 64.61,11.19 64.6,11.25 64.59,11.3 64.56,11.34 64.53,11.39 64.49,11.42 64.45,11.46 64.4,11.48 64.35,11.5 64.3,11.5 64.27,11.51 63.87,11.51 63.85,11.5 63.8,11.5 63.74,11.48 63.7,11.46 63.65,11.42 63.62,11.39 63.59,11.34 63.56,11.3 63.55,11.25 63.54,11.19 63.54,11.17 63.12,11.17 63.12,11.94 61.72,13.34 61.72,15.88 58.93,18.67 58.93,20.37 58.73,20.57 57.99,20.57 57.76,20.35 57.4,20.7 57.4,22.02 58.08,22.02 58.08,21.92 58.09,21.82 58.11,21.73 58.13,21.63 58.16,21.54 58.2,21.44 58.25,21.36 58.3,21.27 58.36,21.19 58.42,21.12 58.49,21.05 58.57,20.99 58.65,20.93 58.74,20.88 58.83,20.84 58.92,20.81 59.02,20.78 59.11,20.76 59.21,20.75 59.31,20.74 59.41,20.75 59.51,20.76 59.6,20.78 59.7,20.81 59.79,20.84 59.88,20.88 59.97,20.93 60.05,20.99 60.12,21.05 60.19,21.12 60.26,21.19 60.32,21.27 60.37,21.36 60.42,21.44 60.46,21.54 60.49,21.63 60.51,21.73 60.53,21.82 60.54,21.92 60.54,22.02 60.53,22.12 60.51,22.22 60.49,22.31 60.46,22.41 60.42,22.5 60.37,22.58 60.32,22.67 60.26,22.75 60.19,22.82 60.12,22.89 60.05,22.95 59.97,23.01 59.88,23.06 59.79,23.1 59.7,23.14 59.6,23.16 59.51,23.18 59.41,23.19 59.31,23.2 59.21,23.19 59.11,23.18 59.02,23.16 58.92,23.14 58.83,23.1 58.74,23.06 58.65,23.01 58.57,22.95 58.49,22.89 58.42,22.82 58.36,22.75 58.3,22.67 58.25,22.58 58.2,22.5 58.16,22.41 58.13,22.31 58.11,22.22 58.09,22.12 58.08,22.02 57.4,22.02 57.4,23.24 58.04,23.88 60.58,23.88
GND2 on TOP: 54.93,65.98 54.93,58.36 56.71,56.58 60.13,60.01 60.13,64.83 58.1,66.87 55.82,66.87
GND2 on TOP: 22.48,38.86 67.56,38.86 67.56,41.4 66.67,42.29 62.23,42.29 61.85,42.67 28.19,42.67 27.69,42.16 22.48,42.16
GND2 on TOP: 35.94,65.91 35.94,58.29 34.16,56.52 30.73,59.94 30.73,64.77 32.77,66.8 35.05,66.8
GND2 on BOTTOM: 22.99,3.56 20.83,5.71 20.83,11.94 24.51,15.62 24.38,21.84 17.02,21.84 16.38,22.48 16.38,30.48 0.25,46.61 0.25,69.6 21.21,69.6 22.23,68.58 22.23,60.33 27.05,65.15 37.47,65.15 37.47,58.42 39.12,56.77 51.56,56.77 53.21,58.42 53.21,65.28 63.37,65.28 67.56,61.09 67.56,47.37 69.09,45.85 69.09,41.02 63.37,35.31 63.37,22.99 61.09,20.7 48.13,20.7 46.48,19.05 29.59,19.05 29.59,11.81 28.32,10.54 28.32,5.08 26.8,3.56 ; 1 cut-out
(no net) on TOP: 54.23,11.05 54.23,3.56 53.98,3.3 53.98,1.02 53.72,0.76 51.56,0.76 51.05,1.27 51.05,10.54 51.56,11.05
(no net) on TOP: 57.78,8.51 57.78,16.89 57.91,17.02 57.91,20.32 58.04,20.45 58.67,20.45 58.8,20.32 58.8,17.91 61.09,15.62 61.09,12.83 62.61,11.3 62.61,8.13 62.48,8 58.29,8
(no net) on TOP: 58.17,3.68 55.5,3.68 55.5,5.46 55.24,5.71 55.24,12.06 53.85,13.46 53.85,19.68 54.61,20.45 56.77,20.45 56.9,20.32 56.9,15.88 56.77,15.75 56.77,7.49 58.17,6.1
(no net) on TOP: 55.12,0.89 54.99,1.02 54.99,2.29 55.12,2.41 58.04,2.41 63.12,7.49 63.12,11.94 61.72,13.34 61.72,15.88 58.67,18.92 58.04,18.92 57.91,19.05 57.91,20.19 57.4,20.7 57.4,23.24 58.04,23.88 60.58,23.88 66.93,17.53 66.93,7.11 60.71,0.89
+V_RAIL on TOP (solid shape): 52.76,11.05 52.85,10.99 52.83,10.88 52.69,10.63 52.64,10.35 52.64,9.21 53.15,8.44 54.17,8.65 54.23,8.56 54.23,3.56 53.98,3.3 53.98,2.57 53.93,2.48 53.84,2.47 53.78,2.48 53.73,2.49 53.33,2.49 53.09,2.39 52.99,2.15 52.99,1.15 53.01,1.03 53.07,0.93 53.09,0.82 53,0.76 51.56,0.76 51.05,1.27 51.05,3.64 51.14,3.63 53.65,3.63 53.75,3.67 53.78,3.76 53.78,5.38 53.75,5.47 53.65,5.51 51.14,5.51 51.05,5.51 51.05,10.54 51.56,11.05
+V_RAIL on TOP: 67.31,60.71 67.44,60.83 67.44,68.83 67.06,69.22 23.5,69.22 23.11,68.83 23.11,60.83 23.24,60.71 28.83,60.71 29.59,61.47 29.59,65.41 31.75,67.56 58.8,67.56 60.96,65.41 60.96,61.47 61.72,60.71
+V_RAIL on BOTTOM: 26.8,65.91 22.86,61.98 22.86,68.58 23.5,69.22 67.06,69.22 67.69,68.58 67.69,61.98 63.75,65.91
+V_RAIL on BOTTOM: 43.05,13.34 43.05,15.24 44.58,16.76 45.21,16.76 48.64,20.19 66.67,20.19 74.04,27.56 74.04,55.63 66.93,62.74 66.93,69.09 67.06,69.22 78.74,69.22 79.38,68.58 79.38,22.61 68.71,11.94 44.45,11.94
PREFILTER+ on TOP: 22.73,46.99 21.59,48.13 21.59,51.82 20.45,52.96 19.43,52.96 18.8,53.59 18.8,55.37 19.43,56.01 20.95,56.01 22.23,54.74 26.92,54.74 27.43,55.24 27.43,58.67 27.81,59.05 29.46,59.05 33.91,54.61 33.91,47.62 33.27,46.99
PREFILTER- on TOP: 65.41,54.86 65.79,55.24 65.79,58.42 66.04,58.67 67.94,58.67 68.83,57.78 68.83,55.63 69.22,56.01 71.12,56.01 71.75,55.37 71.75,53.59 71.12,52.96 70.23,52.96 69.34,52.07 69.34,48.51 68.71,47.88 64.14,47.88 63.37,47.12 57.02,47.12 56.01,48.13 56.01,54.36 56.52,54.86
N20136 on TOP: 43.69,47.62 39.37,47.62 37.47,49.53 37.47,66.04 38.48,67.06 43.69,67.06 44.96,65.79 44.96,48.9
N20333 on TOP: 46.74,47.62 51.05,47.62 52.96,49.53 52.96,66.04 51.94,67.06 46.74,67.06 45.47,65.79 45.47,48.9
N24103 on TOP (solid shape): 58.9,17.57 58.96,17.66 59.07,17.64 60.74,15.97 60.76,15.86 60.67,15.8 58.36,15.8 58.27,15.76 58.23,15.67 58.23,14.05 58.27,13.96 58.36,13.92 60.88,13.92 60.91,13.93 60.94,13.94 61.04,13.93 61.09,13.85 61.09,12.83 62.24,11.68 62.26,11.57 62.16,11.51 61.96,11.51 61.73,11.41 61.63,11.17 61.63,10.17 61.73,9.93 61.96,9.83 62.36,9.83 62.42,9.84 62.48,9.85 62.57,9.84 62.61,9.75 62.61,9.68 62.57,9.59 62.48,9.58 62.42,9.6 62.36,9.6 61.96,9.6 61.73,9.5 61.63,9.26 61.63,8.26 61.63,8.2 61.65,8.14 61.64,8.05 61.56,8 58.29,8 58.09,8.21 58.06,8.32 58.16,8.38 59.25,8.38 59.34,8.42 59.37,8.51 59.37,11.05 59.34,11.14 59.25,11.18 57.85,11.18 57.84,11.18 57.8,11.19 57.78,11.23 57.78,16.89 57.93,17.03 58.03,16.97 58.16,16.94 58.56,16.94 58.8,17.04 58.9,17.28
